# Altium PCB PCB8.pcbdoc
Units mm, origin at the board's own origin, x right, y up, seen from the top; angles counter-clockwise.
Board outline 57.74 x 56.26 mm, 2 copper layers (Top Layer, Bottom Layer); 43 components, 46 nets, 232 pads, 159 vias.
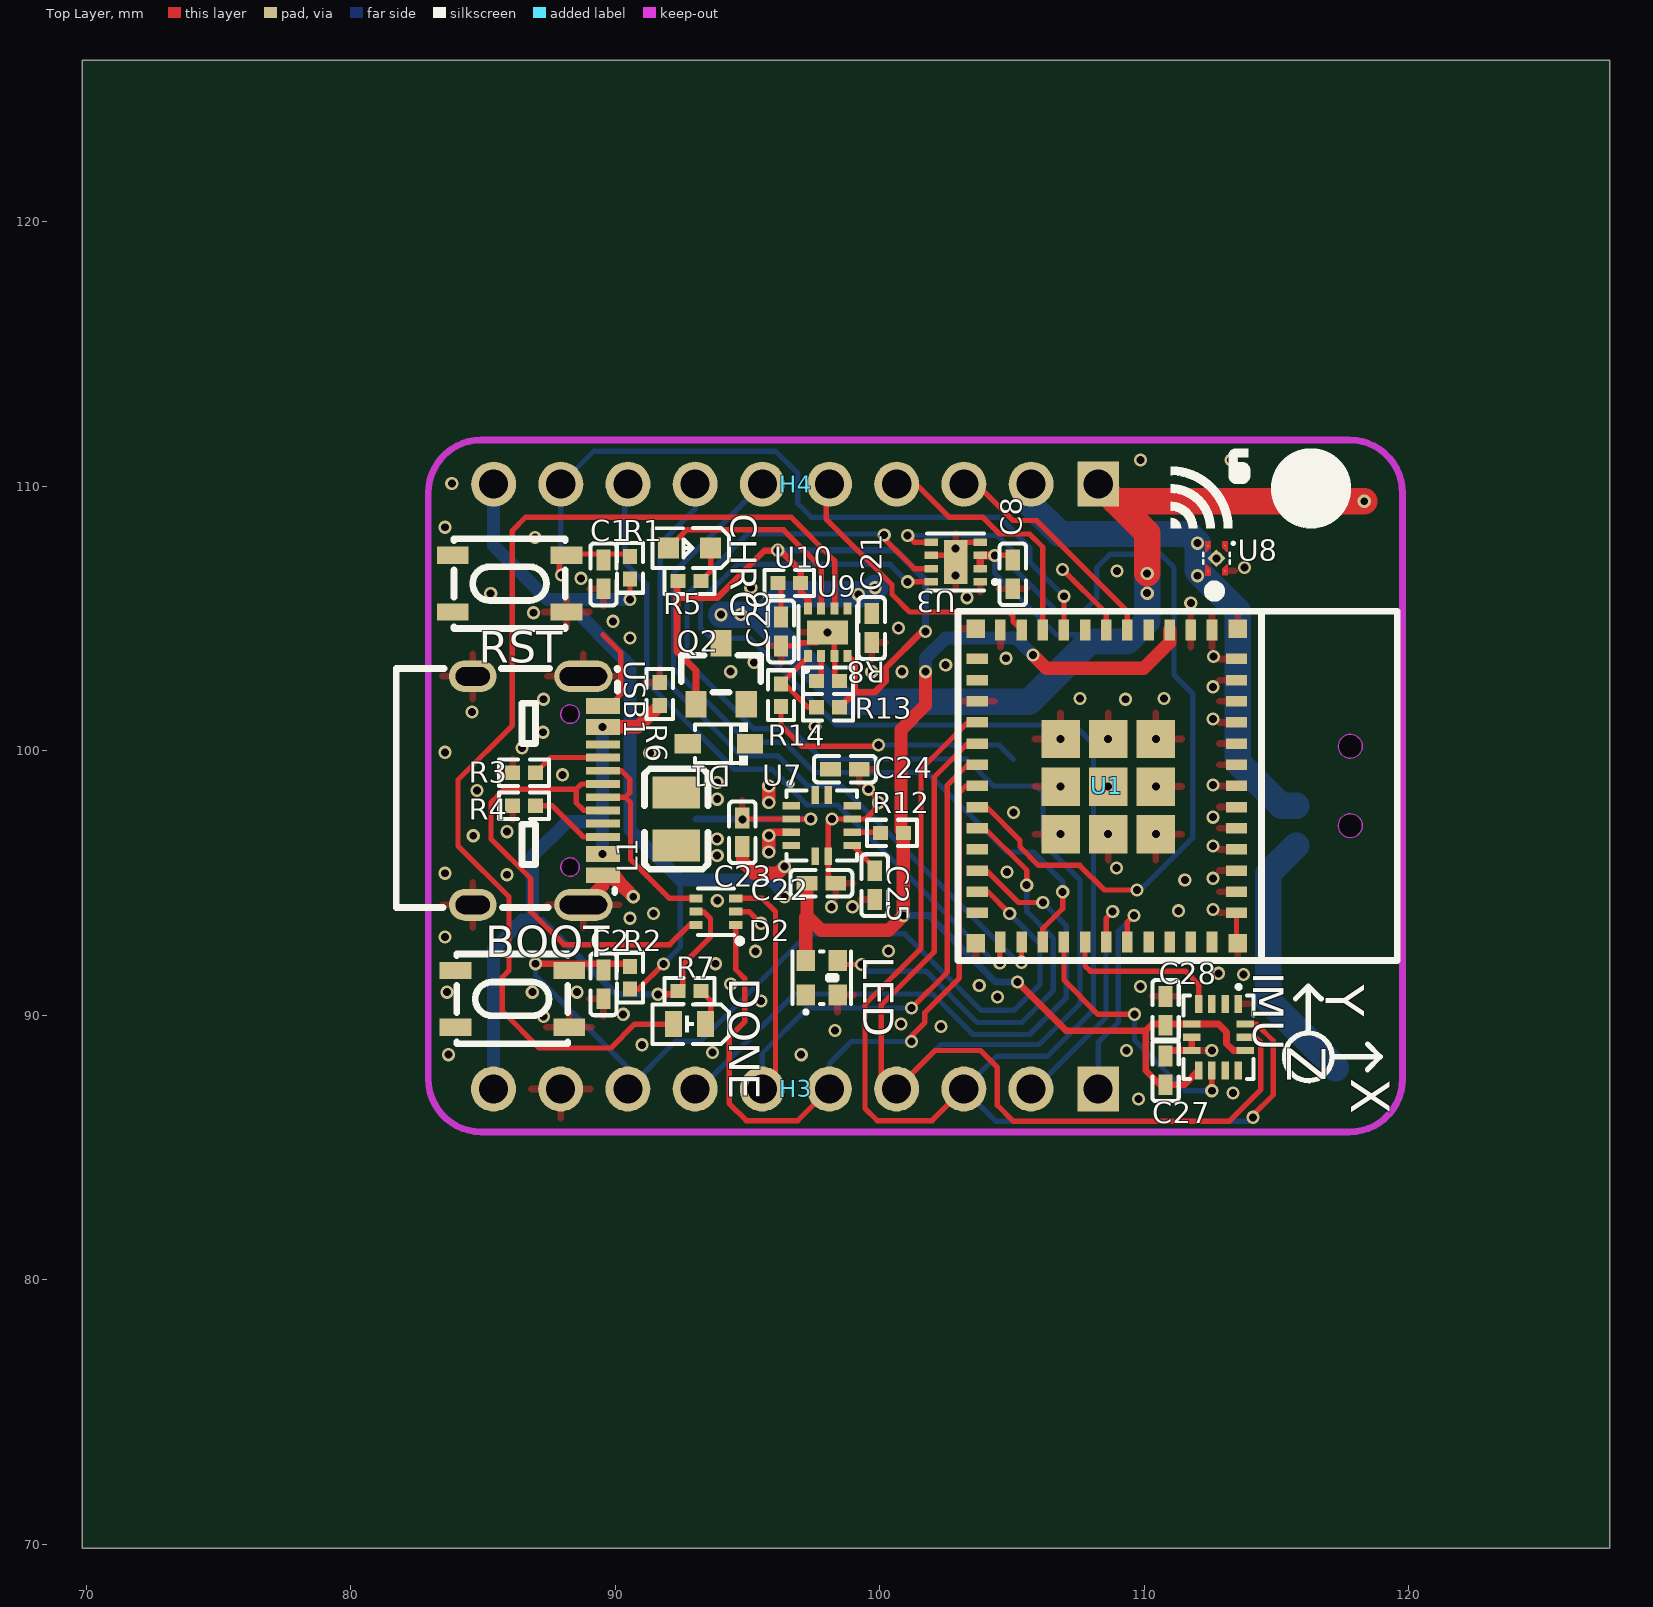
[diagram p0: Top Layer view]
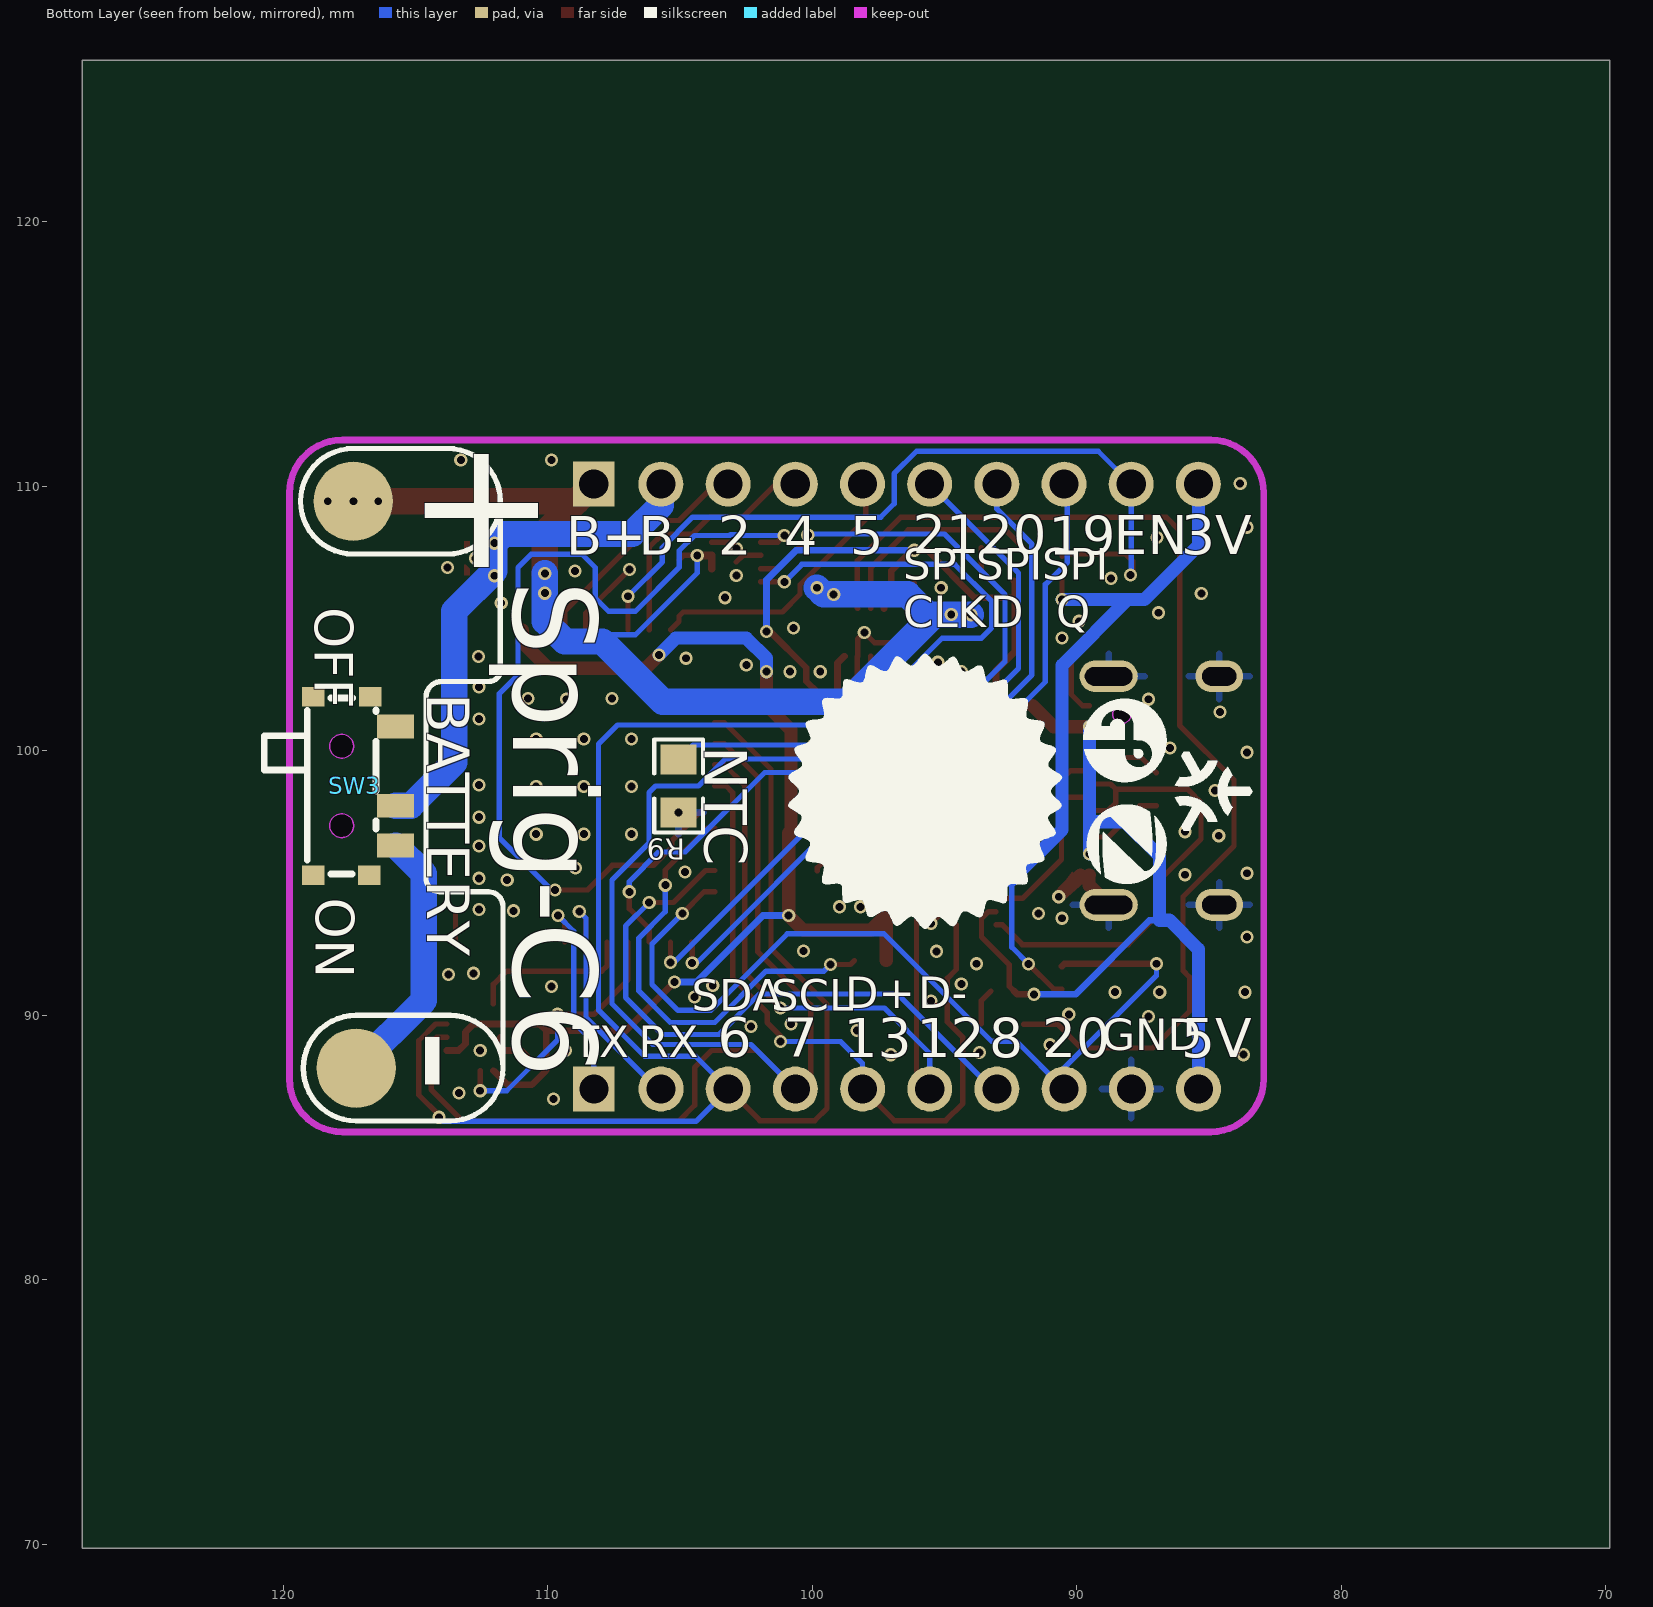
[diagram p1: Bottom Layer view, seen from below]

## Layer stack, top to bottom
Top Layer: signal copper (thickness not stored)
Dielectric: dielectric 0.32, FR-4, Dk 4.8
Bottom Layer: signal copper (thickness not stored)

## Board outline
127.594,69.85 69.85,69.85 69.85,126.111 127.594,126.111

## Design rules (kind name [scope] priority, off if disabled: settings)
BoardOutlineClearance copperThickness1oz [All] p0: genericclearance=0.254 ignorepadtopadclearanceinfootprint=FALSE except(0: Arc-SplitContinuation Track-SplitContinuation SMDPad-SplitContinuation THPad-SplitContinuation Via-SplitContinuation Fill-SplitContinuation Poly-SplitContinuation Region-SplitContinuation Text-SplitContinuation; 0.152: Track-CutoutEdge SMDPad-CutoutEdge THPad-CutoutEdge Via-CutoutEdge Region-CutoutEdge; 0.3: Track-OutlineEdge SMDPad-OutlineEdge THPad-OutlineEdge Via-OutlineEdge Fill-OutlineEdge Region-OutlineEdge Poly-OutlineEdge Text-OutlineEdge Fill-CutoutEdge)
BoardOutlineClearance copperThickness2oz [All] p0: genericclearance=0.254 ignorepadtopadclearanceinfootprint=FALSE except(0: Arc-SplitContinuation Track-SplitContinuation SMDPad-SplitContinuation THPad-SplitContinuation Via-SplitContinuation Fill-SplitContinuation Poly-SplitContinuation Region-SplitContinuation Text-SplitContinuation; 0.152: Track-CutoutEdge SMDPad-CutoutEdge THPad-CutoutEdge Via-CutoutEdge Region-CutoutEdge; 0.3: Track-OutlineEdge SMDPad-OutlineEdge THPad-OutlineEdge Via-OutlineEdge Fill-OutlineEdge Region-OutlineEdge Poly-OutlineEdge Text-OutlineEdge Fill-CutoutEdge)
Clearance copperThickness1oz [(InNet('D09') OR InNet('GND') OR InNet('EN') OR InNet('VBAT') OR InNet('VIN') OR InNet('VCC') OR InNet('DN1') OR InNet('DP1') OR InNet('RX') OR InNet('TX') OR InNet('D-') OR InNet('D+') OR InNet('SCL') OR InNet('SDA') OR InNet('D04') OR InNet('3.3V') OR InNet('D08') OR InNet('D05') OR InNet('B-') OR InNet('ALRT') OR InNet('$2N1935') OR InNet('$2N1945') OR InNet('$2N1952') OR InNet('$2N1959') OR InNet('$2N1954') OR InNet('$2N1955') OR InNet('D02') OR InNet('SPICLK') OR InNet('SPID') OR InNet('SPIQ') OR InNet('$2N1928') OR InNet('$2N1927') OR InNet('$2N1916') OR InNet('$2N1918') OR InNet('$2N1946') OR InNet('$2N1949') OR InNet('$2N1932') OR InNet('$2N1948') OR InNet('B-_C') OR InNet('RESET') OR InNet('BUSY') OR InNet('DIO1') OR InNet('D15') OR InNet('SPICS2') OR InNet('D22') OR InNet('D23'))] p1: gap=0.178 ignorepadtopadclearanceinfootprint=FALSE except(0.102: Track-Track; 0.152: Track-SMDPad SMDPad-SMDPad Track-THPad SMDPad-THPad THPad-THPad Track-Via SMDPad-Via THPad-Via Via-Via SMDPad-Fill THPad-Fill Via-Fill Fill-Fill Track-Region SMDPad-Region THPad-Region Via-Region Region-Region Track-Poly SMDPad-Poly THPad-Poly Via-Poly Fill-Poly Region-Poly Poly-Poly Track-Text SMDPad-Text THPad-Text Via-Text Fill-Text Region-Text Poly-Text Text-Text; 0.175: Track-Hole SMDPad-Hole THPad-Hole Via-Hole Fill-Hole Region-Hole Poly-Hole Text-Hole Sheet-Hole; 0.3: Track-Fill Fill-Region Track-Sheet SMDPad-Sheet THPad-Sheet Via-Sheet Fill-Sheet Region-Sheet Poly-Sheet Text-Sheet)
Clearance copperThickness2oz [All] p1: gap=0.178 ignorepadtopadclearanceinfootprint=FALSE except(0.152: Track-SMDPad SMDPad-SMDPad Track-THPad SMDPad-THPad THPad-THPad Track-Via SMDPad-Via THPad-Via Via-Via SMDPad-Fill THPad-Fill Via-Fill Fill-Fill Track-Region SMDPad-Region THPad-Region Via-Region Region-Region Track-Poly SMDPad-Poly THPad-Poly Via-Poly Fill-Poly Region-Poly Poly-Poly Track-Text SMDPad-Text THPad-Text Via-Text Fill-Text Region-Text Poly-Text Text-Text; 0.175: Track-Hole SMDPad-Hole THPad-Hole Via-Hole Fill-Hole Region-Hole Poly-Hole Text-Hole Sheet-Hole; 0.203: Track-Track; 0.3: Track-Fill Fill-Region Track-Sheet SMDPad-Sheet THPad-Sheet Via-Sheet Fill-Sheet Region-Sheet Poly-Sheet Text-Sheet)
DiffPairsRouting differentialPair [All] p1: maxuncoupledlength=10 minlimit=6 maxlimit=6 mostfreqgap=6 toplayer_minwidth=5 toplayer_prefwidth=10 toplayer_maxwidth=100 bottomlayer_minwidth=5 bottomlayer_prefwidth=10 bottomlayer_maxwidth=100
PasteMaskExpansion pasteMaskExpansion [All] p1: expansion=0
PlaneConnect innerPlane [All] p1: planeconnectstyle=Relief reliefexpansion=0.508 reliefentries=4 reliefconductorwidth=0.254 reliefairgap=0.254
PolygonConnect copperRegion [All] p1: connectstyle=Relief reliefentries=4 reliefconductorwidth=10 polygonreliefangle="90 Angle" airgapwidth=10
PolygonConnect solid [All] p1: connectstyle=Direct reliefentries=4 reliefconductorwidth=10 polygonreliefangle="90 Angle" airgapwidth=10
RoutingVias viaSize [All] p1: viastyle="Through Hole" holewidth=12.0078 minholewidth=11.811 maxholewidth=248.0314 width=24.0158 minwidth=19.685 maxwidth=393.7008
SolderMaskExpansion solderMaskExpansion [All] p1: useseparateexpansions=TRUE expansion=2 expansionbottom=2
Width copperThickness1oz [All] p1: maxlimit=100 minlimit=5 preferedwidth=10
Width copperThickness2oz [All] p1: maxlimit=100 minlimit=8 preferedwidth=10

## Components (designator, comment, footprint, x,y, rotation, side; value= is the part's Value field where it differs from the comment)
BOOT "TSA016A2518C" SW-SMD_4P-L4.2-W3.3-P2.15-LS4.6 86.104,90.627 r0 top
C1 "0402B104K160NT" C0402 89.554,106.677 r90 top
C2 "0402B104K160NT" C0402 89.554,91.177 r90 top
C8 "0402B104K160NT" C0402 105.029,106.68 r90 top
C21 "CL05A106MQ5NUNC" C0402 99.695,104.648 r90 top
C22 "HGC0402R5226M6R3NTEJ" C0402 97.79,94.996 r180 top
C23 "HGC0402R5226M6R3NTEJ" C0402 94.804,96.927 r270 top
C24 "HGC0402R5226M6R3NTEJ" C0402 98.679,99.314 r180 top
C25 "CC0402KRX7R9BB102" C0402 99.804,94.927 r90 top
C26 "CL05A106MQ5NUNC" C0402 96.266,104.521 r90 top
C27 "0402B104K160NT" C0402 110.804,87.927 r270 top
C28 "0402B104K160NT" C0402 110.804,90.177 r90 top
CHRG "NCD0603O3" LED0603-RD 92.804,107.677 r180 top
D1 "1N5819WS_C191023" SOD-323_L1.8-W1.3-LS2.5-RD 93.919,100.272 r180 top
D2 "USBLC6-2P6" SOT-666-6_L1.6-W1.2-P0.50-LS1.6-BL 93.804,93.927 r90 top
DONE "F.0603.00048/P2-0603W6YS2-06T-002" LED-SMD_L1.6-W0.8-RD-WHITE-2 92.804,89.677 r180 top
H3 "DZ254R-11-10-63" HDR-TH_10P-P2.54-V-M 96.825,87.221 r180 top
H4 "DZ254R-11-10-63" HDR-TH_10P-P2.54-V-M 96.829,110.089 r180 top
IMU "BMI260" LGA-14_L3.0-W2.5-P0.50-TL 112.804,89.177 r270 top
L1 "DFE201610E-1R5M=P2" L0806 92.304,97.427 r90 top
LED "SK6805D-EC2018" LED-SMD_4P-L2.0-W1.8-BL_SK6805D 97.804,91.427 r0 top
Q2 "AO3401A_C15127" SOT-23_L2.9-W1.3-P1.90-LS2.4-BR 93.998,102.919 r270 top
R1 "RMS04FT1002" R0402 90.554,106.927 r270 top
R2 "RMS04FT1002" R0402 90.554,91.427 r270 top
R3 "0402WGJ0512TCE" R0402 86.554,99.177 r180 top
R4 "0402WGJ0512TCE" R0402 86.554,97.927 r0 top
R5 "RC-02K681JT" R0402 92.804,106.427 r0 top
R6 "RMS04FT1002" R0402 91.677,102.153 r270 top
R7 "0402WGF2000TCE" R0402 92.804,90.927 r0 top
R8 "0402WGF2001TCE" R0402 98.042,102.649 r180 top
R9 "FNTC0805X104F4250FB" R0805 105.054,98.677 r90 bottom
R12 "0402WGF1004TCE" R0402 100.457,96.901 r0 top
R13 "0402WGF1003TCE" R0402 98.042,101.649 r180 top
R14 "ERJ2RKF6202X" R0402 96.266,102.108 r90 top
RST "TSA016A2518C" SW-SMD_4P-L4.2-W3.3-P2.15-LS4.6 86.004,106.327 r0 top
SW3 "MK-12C03-G015" SW-SMD_MK-12C03-G015 117.304,98.677 r270 bottom
U1 "ESP32-C6-MINI-1-N4" WIFIM-SMD_61P-L16.6-W13.2-P0.80-ESP32-C6-MINI-1-N4 108.585,98.679 r270 top
U3 "MAX17048G+T10" DFN-8_L2.0-W2.0-P0.50-BL-EP 102.87,107.145 r90 top
U7 "TPS63051RMWR" QFN-12_L2.5-W2.5-P0.50-TL 97.804,97.177 r0 top
U8 "AP6683" DFN-4_L1.0-W1.0-P0.65-BL-EP 112.73,107.285 r180 top
U9 "LGS4056H" DFN-8_L2.0-W2.0-P0.50-TL-EP1.6 98.031,104.485 r90 top
U10 "FRC0402F1R00TS" R0402 96.576,106.352 r180 top
USB1 "U262-161N-4BVC11" USB-3.1-SMD_U262-161N-4BVC11 87.071,98.501 r270 top

## Footprints (in the part's own frame and the unit in brackets; to place one, negate y for a bottom-side part, rotate by r counter-clockwise, add the part's x,y. Pads: shape width x height; smd on the part's side, far side on the other; paste and mask are expansions set on the pad)
C0402 [mm]
  rect 0.79x0.54 smd: 1(-0.545,0) 2(0.545,0)
  silkscreen extent -1.17,-0.5 1.17,0.5
DFN-4_L1.0-W1.0-P0.65-BL-EP [mm]
  round 0.04 smd: 1(-0.325,-0.475) 2(0.325,-0.474) 3(0.325,0.475) 4(-0.325,0.475)
  rect 0.48x0.48 smd rot 45: 5(0.004,0.001)
  Top Layer region: 0.425,-0.649 0.225,-0.649 0.225,-0.399 0.225,-0.399 0.375,-0.249 0.425,-0.249
  Top Layer region: -0.225,-0.4 -0.225,-0.65 -0.425,-0.65 -0.425,-0.25 -0.375,-0.25
  Top Layer region: -0.425,0.651 -0.225,0.651 -0.225,0.401 -0.225,0.401 -0.375,0.251 -0.425,0.251
  Top Layer region: 0.425,0.651 0.225,0.651 0.225,0.401 0.225,0.401 0.375,0.251 0.425,0.251
  silkscreen extent -0.68,-0.61 0.5,0.21
DFN-8_L2.0-W2.0-P0.50-BL-EP [mm]
  rect 0.28x0.505 smd: 1(-0.75,-0.927) 2(-0.25,-0.927) 3(0.25,-0.927) 4(0.75,-0.927) 5(0.75,0.928) 6(0.25,0.928) 7(-0.25,0.928) 8(-0.75,0.928)
  rect 1.65x0.9 smd: 9(0,0)
  silkscreen extent -1.08,-1.56 1.08,1.08
DFN-8_L2.0-W2.0-P0.50-TL-EP1.6 [mm]
  rect 0.45x0.3 smd: 1(-0.9,0.75) 2(-0.9,0.25) 3(-0.9,-0.25) 4(-0.9,-0.75) 5(0.9,-0.75) 6(0.9,-0.25) 7(0.9,0.25) 8(0.9,0.75)
  rect 0.9x1.55 smd: 9(-0.001,0.002)
  silkscreen extent -1.49,-1.1 1,1.1
HDR-TH_10P-P2.54-V-M [mm]
  rect 1.575x1.7 hole 1.1: 1(-11.43,0)
  round 1.7 hole 1.1: 2(-8.89,0) 3(-6.35,0) 4(-3.81,0) 5(-1.27,0) 6(1.27,0) 7(3.81,0) 8(6.35,0) 9(8.89,0) 10(11.43,0)
L0806 [mm]
  rect 1.2x1.8 smd: 1(-1,0) 2(1,0)
  silkscreen extent -1.9,-1.2 1.9,1.2
LED0603-RD [mm]
  rect 0.8x0.8 smd: 1(-0.799,-0.003) 2(0.799,0.003)
  silkscreen extent -1.49,-0.75 1.39,0.76
LED-SMD_4P-L2.0-W1.8-BL_SK6805D [mm]
  rect 0.7x0.8 smd: 1(-0.6,-0.65) 2(0.6,-0.65) 3(0.6,0.65) 4(-0.6,0.65)
  silkscreen extent -1.1,-1.36 1.1,1
LED-SMD_L1.6-W0.8-RD-WHITE-2 [mm]
  rect 0.65x1 smd: 1(-0.6,0) 2(0.6,0)
  silkscreen extent -1.49,-0.75 1.39,0.76
LGA-14_L3.0-W2.5-P0.50-TL [mm]
  rect 0.675x0.28 smd: 1(-1.262,0.75) 2(-1.262,0.25) 3(-1.262,-0.25) 4(-1.262,-0.75) 8(1.262,-0.75) 9(1.262,-0.25) 10(1.262,0.25) 11(1.262,0.75)
  rect 0.28x0.675 smd: 5(-0.5,-1.012) 6(0,-1.012) 7(0.5,-1.012) 12(0.5,1.012) 13(0,1.012) 14(-0.5,1.012)
  silkscreen extent -1.98,-1.33 1.58,1.33
QFN-12_L2.5-W2.5-P0.50-TL [mm]
  rect 0.665x0.28 smd: 1(-1.157,0.75) 2(-1.157,0.25) 3(-1.157,-0.25) 4(-1.157,-0.75) 7(1.157,-0.75) 8(1.157,-0.25) 9(1.157,0.25) 10(1.157,0.75)
  rect 0.28x0.665 smd: 5(-0.25,-1.157) 6(0.25,-1.157) 11(0.25,1.157) 12(-0.25,1.157)
  silkscreen extent -1.33,-1.33 1.33,1.66
R0402 [mm]
  rect 0.566x0.54 smd: 1(-0.433,0) 2(0.433,0)
  silkscreen extent -0.94,-0.5 0.94,0.5
R0805 [mm]
  rect 1.133x1.377 smd: 1(-1,0) 2(1,0)
  silkscreen extent -1.76,-0.92 1.76,0.92
SOD-323_L1.8-W1.3-LS2.5-RD [mm]
  rect 1x0.75 smd: 1(-1.173,0) 2(1.173,0)
  silkscreen extent -1.08,-0.8 0.9,0.8
SOT-23_L2.9-W1.3-P1.90-LS2.4-BR [mm]
  rect 1x0.8 smd: 1(1.15,-0.95) 2(1.15,0.95) 3(-1.15,0)
  silkscreen extent -0.7,-1.5 0.7,1.5
SOT-666-6_L1.6-W1.2-P0.50-LS1.6-BL [mm]
  rect 0.3x0.5 smd: 1(-0.5,-0.75) 2(0,-0.75) 3(0.5,-0.75) 4(0.5,0.75) 5(0,0.75) 6(-0.5,0.75)
  silkscreen extent -1.21,-1.01 0.88,0.68
SW-SMD_4P-L4.2-W3.3-P2.15-LS4.6 [mm]
  rect 1.2x0.65 smd: 1(-2.15,1.075) 2(2.15,1.075) 3(-2.15,-1.075) 4(2.15,-1.075)
  silkscreen extent -2.1,-1.7 2.1,1.7
SW-SMD_MK-12C03-G015 [mm]
  rect 0.9x1.4 smd: 1(-2.25,1.559) 2(0.75,1.559) 3(2.25,1.559)
  rect 0.75x0.85 smd: 4(-3.375,0.592) 5(-3.375,-1.559) 6(3.375,0.567) 7(3.375,-1.558)
  Board Outline Layer circle w0.005: c1.5,-0.483 r0.45
  Board Outline Layer circle w0.005: c-1.5,-0.484 r0.45
  Board Outline Layer region: 1.5,-0.933 1.695,-0.889 1.852,-0.764 1.938,-0.583 1.938,-0.383 1.852,-0.203 1.695,-0.078 1.5,-0.033 1.5,-0.033 1.304,-0.078 1.148,-0.203 1.061,-0.383 1.061,-0.583 1.148,-0.764 1.304,-0.889 1.5,-0.933
  Board Outline Layer region: -1.5,-0.934 -1.305,-0.889 -1.148,-0.764 -1.062,-0.584 -1.062,-0.383 -1.148,-0.203 -1.305,-0.078 -1.5,-0.034 -1.5,-0.034 -1.696,-0.078 -1.852,-0.203 -1.939,-0.383 -1.939,-0.584 -1.852,-0.764 -1.696,-0.889 -1.5,-0.934
  Multi-Layer board cut-out: 1.5,-0.933 1.695,-0.889 1.852,-0.764 1.938,-0.583 1.938,-0.383 1.852,-0.203 1.695,-0.078 1.5,-0.033 1.5,-0.033 1.304,-0.078 1.148,-0.203 1.061,-0.383 1.061,-0.583 1.148,-0.764 1.304,-0.889 1.5,-0.933
  Multi-Layer board cut-out: -1.5,-0.934 -1.305,-0.889 -1.148,-0.764 -1.062,-0.584 -1.062,-0.383 -1.148,-0.203 -1.305,-0.078 -1.5,-0.034 -1.5,-0.034 -1.696,-0.078 -1.852,-0.203 -1.939,-0.383 -1.939,-0.584 -1.852,-0.764 -1.696,-0.889 -1.5,-0.934
  silkscreen extent -3.33,-3.41 3.32,0.82
USB-3.1-SMD_U262-161N-4BVC11 [mm]
  rect 0.6x1.3 smd: A1B12(-3.2,2.461) A4B9(-2.4,2.461) B1A12(3.2,2.461) B4A9(2.4,2.461)
  rect 0.3x1.3 smd: A5(-1.25,2.461) A6(-0.25,2.461) A7(0.25,2.461) A8(1.25,2.461) B5(1.75,2.461) B6(0.75,2.461) B7(-0.75,2.461) B8(-1.75,2.461)
  oval 1.2x2.2 hole 0.7 slot 1.8 at 90 deg: SHELL(-4.32,1.719) SHELL(4.32,1.719)
  oval 1.2x1.8 hole 0.7 slot 1.3 at 90 deg: SHELL(-4.32,-2.461) SHELL(4.32,-2.461)
  Board Outline Layer circle w0.005: c2.89,1.219 r0.35
  Board Outline Layer circle w0.005: c-2.89,1.219 r0.35
  Board Outline Layer region: 2.89,1.569 3.042,1.534 3.164,1.437 3.231,1.297 3.231,1.141 3.164,1 3.042,0.903 2.89,0.869 2.89,0.869 2.738,0.903 2.616,1 2.549,1.141 2.549,1.297 2.616,1.437 2.738,1.534 2.89,1.569
  Board Outline Layer region: -2.89,1.569 -2.738,1.534 -2.616,1.437 -2.549,1.297 -2.549,1.141 -2.616,1 -2.738,0.903 -2.89,0.869 -2.89,0.869 -3.042,0.903 -3.164,1 -3.231,1.141 -3.231,1.297 -3.164,1.437 -3.042,1.534 -2.89,1.569
  Multi-Layer board cut-out: 2.89,1.569 3.042,1.534 3.164,1.437 3.231,1.297 3.231,1.141 3.164,1 3.042,0.903 2.89,0.869 2.89,0.869 2.738,0.903 2.616,1 2.549,1.141 2.549,1.297 2.616,1.437 2.738,1.534 2.89,1.569
  Multi-Layer board cut-out: -2.89,1.569 -2.738,1.534 -2.616,1.437 -2.549,1.297 -2.549,1.141 -2.616,1 -2.738,0.903 -2.89,0.869 -2.89,0.869 -3.042,0.903 -3.164,1 -3.231,1.141 -3.231,1.297 -3.164,1.437 -3.042,1.534 -2.89,1.569
  silkscreen extent -4.62,-5.35 4.42,3.01
WIFIM-SMD_61P-L16.6-W13.2-P0.80-ESP32-C6-MINI-1-N4 [mm]
  rect 0.8x0.4 smd: 1(-5.9,3.975) 2(-5.9,3.175) 3(-5.9,2.375) 4(-5.9,1.575) 5(-5.9,0.775) 6(-5.9,-0.025) 7(-5.9,-0.825) 8(-5.9,-1.625) 9(-5.9,-2.425) 10(-5.9,-3.225) 11(-5.9,-4.025) 25(5.9,-4.025) 26(5.9,-3.225) 27(5.9,-2.425) 28(5.9,-1.625) 29(5.9,-0.825) 30(5.9,-0.025) 31(5.9,0.775) 32(5.9,1.575) 33(5.9,2.375) 34(5.9,3.175) 35(5.9,3.975)
  rect 0.4x0.8 smd: 12(-4.8,-4.9) 13(-4,-4.9) 14(-3.2,-4.9) 15(-2.4,-4.9) 16(-1.6,-4.9) 17(-0.8,-4.9) 18(0,-4.9) 19(0.8,-4.9) 20(1.6,-4.9) 21(2.4,-4.9) 22(3.2,-4.9) 23(4,-4.9) 24(4.8,-4.9) 36(4.8,4.9) 37(4,4.9) 38(3.2,4.9) 39(2.4,4.9) 40(1.6,4.9) 41(0.8,4.9) 42(0,4.9) 43(-0.8,4.9) 44(-1.6,4.9) 45(-2.4,4.9) 46(-3.2,4.9) 47(-4,4.9) 48(-4.8,4.9)
  rect 1.45x1.45 smd: 49(-1.775,1.85) 49(-1.775,0.05) 49(-1.775,-1.75) 49(0.025,1.85) 49(0.025,0.05) 49(0.025,-1.75) 49(1.825,1.85) 49(1.825,0.05) 49(1.825,-1.75)
  rect 0.7x0.7 smd: 50(5.95,4.95) 51(5.95,-4.95) 52(-5.95,-4.95) 53(-5.95,4.95)
  silkscreen extent -7.57,-5.62 6.6,10.98

## Free pads (board coordinates)
  round 3 smd far side: 1(117.348,109.441) 2(117.244,88.01)

## Via types
v1: diameter 0.5, hole 0.3, Top Layer to Bottom Layer, 159 vias

## Nets (pads, with @x,y where several pads share a name; then routed paths per layer and width w, separated by ;. In a path a pad name is that pad's centre, name@x,y a point inside that pad or via, vN(x,y) a via of type N, cw(c..) or ccw(c..) an arc to the next point about the centre after c; other vN are vias at no path point)
3.3V: C22.2 C23.2 C27.2 C28.1 H4.10 IMU.5 IMU.8 IMU.12 LED.4 R1.2 R2.2 R12.2 U1.3 U7.4 U7.5 | length 81.6
  Top Layer w0.2: R2.2 90.867,90.994 v1(91.821,91.948) ; v1(90.554,105.732) R1.2
  Top Layer w0.254: v1(105.207,91.262) 107.042,89.427 110.054,89.427 ; IMU.8 111.521,87.382 C27.2 110.599,87.382 110.054,87.927 110.054,89.427 ; IMU.12 113.365,88.677 113.111,88.931 113.111,89.37 112.804,89.677 IMU.5 110.849,89.677 C28.1 110.759,89.677 110.304,89.677 110.054,89.427
  Top Layer w0.5: C23.2 94.804,95.823 95.25,95.377 96.139,95.377 v1(96.393,95.631) ; LED.4 97.204,93.722 97.245,93.763 ; C22.2 97.245,93.763 ; v1(101.727,102.997) 101.727,101.727 100.804,100.804 100.804,96.987 R12.2 v1(100.89,93.778) 100.33,93.218 97.79,93.218 97.245,93.763 ; v1(105.791,103.632) 106.299,103.124 109.982,103.124 110.96,104.102 U1.3
  Bottom Layer w0.2: v1(91.821,91.948) 92.456,92.583 92.456,95.123
  Bottom Layer w0.254: v1(100.89,93.778) 101.865,93.778 104.38,91.262 v1(105.207,91.262)
  Bottom Layer w0.5: H4.10 85.399,107.768 87.435,105.732 88.07,105.732 ; v1(90.554,105.732) 88.07,105.732 ; v1(96.393,94.484) 96.393,94.615 95.885,95.123 ; v1(96.393,95.631) 95.885,95.123 ; v1(101.727,102.997) 101.727,103.505 102.489,104.267 105.156,104.267 v1(105.791,103.632) ; 88.07,105.732 90.554,103.248 90.554,97.025 92.456,95.123 95.885,95.123
$2N1916: R3.1 USB1.A5 | length 2.8
  Top Layer w0.2: R3.1 87.561,99.751 USB1.A5
$2N1918: R4.2 USB1.B5 | length 3
  Top Layer w0.2: R4.2 87.62,97.927 88.796,96.751 USB1.B5
$2N1927: L1.1 U7.3 | length 1.5
  Top Layer w0.28: v1@95.804,96.872 95.859,96.927 U7.3
  Top Layer w0.5: v1(95.804,96.177) v1(95.804,96.8)
  other v1: 93.851,96.05 93.851,96.677
$2N1928: L1.2 U7.1 | length 0.6
  Top Layer w0.5: v1(95.804,98.054) v1(95.804,98.677)
  other v1: 93.853,98.179 93.853,98.806
$2N1932: R12.1 U7.8 | length 1.1
  Top Layer w0.2: U7.8 99.998,96.927 R12.1
$2N1935: C25.2 U7.7 | length 1.3
  Top Layer w0.2: U7.7 99.804,95.584 C25.2
$2N1945: C26.2 U10.2 | length 1.3
  Top Layer w0.2: U10.2 96.266,106.23 C26.2
$2N1946: R8.2 U9.2 | length 1
  Top Layer w0.2: R8.2 97.781,102.821 U9.2
$2N1948: R13.2 R14.2 U9.1 | length 3.2
  Top Layer w0.2: U9.1 97.281,103.556 R14.2 96.39,102.541 97.282,101.649 R13.2
$2N1949: R9.2 R14.1 | length 10.1
  Top Layer w0.2: R14.1 96.266,100.965 97.056,100.175 99.904,100.175 v1(99.953,100.224)
  Bottom Layer w0.2: v1(99.953,100.224) 104.507,100.224 R9.2
$2N1952: CHRG.2 U9.7 | length 8.2
  Top Layer w0.2: CHRG.2 92.69,108.359 96.365,108.359 97.781,106.943 U9.7
$2N1954: DONE.1 R7.2 | length 1.4
  Top Layer w0.2: R7.2 93.603,90.56 DONE.1@93.603,89.68
$2N1955: DONE.2 U9.6 | length 42
  Top Layer w0.2: DONE.2@92.005,89.674 90.731,89.674 89.83,88.773 87.122,88.773 85.725,90.17 85.725,91.44 85.979,91.694 85.979,94.488 84.054,96.413 84.054,98.913 86.106,100.965 86.106,108.331 86.614,108.839 96.647,108.839 98.298,107.188 98.298,105.402 U9.6
$2N1959: CHRG.1 R5.2 | length 1.4
  Top Layer w0.2: R5.2 93.603,106.794 CHRG.1
ALRT: U1.19 U3.5 | length 35.3
  Top Layer w0.2: v1(101.053,108.149) 101.307,107.895 U3.5 ; U1.19 104.044,97.879 105.304,96.619 105.304,96.377 106.004,95.677 107.554,95.677 108.489,94.742 v1(109.728,94.742)
  Bottom Layer w0.2: v1(101.053,108.149) 102.618,108.149 102.651,108.182 103.089,108.182 103.122,108.149 104.449,108.149 105.029,107.569 105.029,106.934 106.68,105.283 107.696,105.283 108.204,105.791 108.204,106.934 108.712,107.442 110.617,107.442 111.125,106.934 111.125,102.87 111.836,102.159 111.836,96.723 109.855,94.742 v1(109.728,94.742)
B-: H4.2 SW3.2 U8.2 U8.3 U8.5 | length 19.5
  Bottom Layer w1: H4.2 105.719,109.292 106.807,108.204 111.667,108.204 v1(112.014,107.857) 112.014,106.807 113.538,105.283 113.538,99.568 115.179,97.927 SW3.2
  other v1: 112.014,106.624 112.726,107.284
B-_C: pad.2 SW3.3 | length 9.9
  Bottom Layer w1: SW3.3 114.681,95.363 114.681,90.573 pad.2
BUSY: U1.12
D02: H4.3 U1.5 | length 8.9
  Top Layer w0.2: H4.3 103.652,110.089 105.029,108.712 105.918,108.712 109.36,105.27 U1.5
D04: H4.4 U1.9 | length 9.6
  Top Layer w0.2: H4.4 101.366,110.089 102.616,108.839 103.886,108.839 104.521,108.204 105.664,108.204 106.16,107.708 U1.9
D05: H4.5 U1.10 | length 10.8
  Top Layer w0.2: H4.5 97.972,109.962 97.972,108.77 100.457,106.285 100.457,105.926 101.125,105.258 104.875,105.258 105.039,105.095 105.039,104.892 105.352,104.579 U1.10
D08: H3.7 U1.22 | length 23.7
  Top Layer w0.2: U1.22 104.032,95.479 105.242,94.269 v1(106.162,94.269)
  Bottom Layer w0.2: H3.7 93.19,87.221 96.78,90.811 102.001,90.811 103.53,89.281 105.658,89.281 107.054,90.677 107.054,93.377 v1(106.162,94.269)
D09: BOOT.2 C2.2 H3.8 R2.1 U1.23 | length 34.1
  Top Layer w0.2: U1.23 104.084,94.679 v1(104.91,93.853)
  Top Layer w0.254: v1(86.986,91.956) 90.458,91.956 R2.1
  Bottom Layer w0.2: v1(86.986,91.956) 86.986,91.507 90.475,88.018 H3.8 92.281,89.027 93.218,89.027 97.282,93.091 100.94,93.091 103.835,90.195 105.072,90.195 106.054,91.177 106.054,92.709 v1(104.91,93.853)
D15: LED.3 U1.20 | length 17.1
  Top Layer w0.2: LED.3 98.554,91.927 v1(99.304,91.927) ; U1.20 103.968,97.079 105.554,95.493 v1(105.554,94.927)
  Bottom Layer w0.2: v1(99.304,91.927) 99.554,91.677 101.744,91.677 103.683,89.738 105.365,89.738 106.554,90.927 106.554,92.927 105.554,93.927 v1(105.554,94.927)
D22: IMU.9 U1.28 | length 10.1
  Top Layer w0.2: U1.28 106.96,91.338 108.255,90.043 v1(109.626,90.043) ; v1(112.554,87.153) IMU.9
  Bottom Layer w0.2: v1(109.626,90.043) 109.626,89.077 111.55,87.153 v1(112.554,87.153)
D23: IMU.4 U1.29 | length 6.2
  Top Layer w0.2: U1.29 107.76,91.877 107.96,91.677 111.554,91.677 112.054,91.177 IMU.4
D+: D2.1 H3.5 U1.18 | length 27
  Top Layer w0.2: D2.1 94.554,91.741 94.89,91.405 94.89,89.759 94.304,89.173 94.304,86.677 94.956,86.025 96.899,86.025 H3.5 ; v1(101.194,89.017) 101.194,89.231 101.702,89.738 101.702,90.11 103.006,91.415 103.006,98.434 103.251,98.679 U1.18
  Bottom Layer w0.2: H3.5 98.095,88.189 98.923,89.017 v1(101.194,89.017)
D-: D2.3 H3.6 U1.17 | length 26.8
  Top Layer w0.2: D2.3 95.554,94.427 96.054,93.927 96.054,87.72 H3.6 ; v1(101.2,90.282) 102.554,91.636 102.554,98.707 103.326,99.479 U1.17
  Bottom Layer w0.2: H3.6 95.555,88.57 97.267,90.282 v1(101.2,90.282)
DIO1: U1.13
DN1: D2.4 USB1.A7 USB1.B7 | length 8.3
  Top Layer w0.2: USB1.A7 90.377,98.251 ; USB1.B7 90.233,99.251 90.551,98.933 90.551,98.425 90.377,98.251 ; D2.4 92.054,94.427 90.577,95.904 90.577,98.051 90.377,98.251
DP1: D2.6 USB1.A6 USB1.B6 | length 18
  Top Layer w0.2: USB1.B6 88.812,97.751 88.519,98.044 88.519,98.552 ; USB1.A6 88.718,98.751 88.519,98.552 ; D2.6 92.804,93.427 92.054,92.677 88.054,92.677 86.804,93.927 86.804,95.177 85.304,96.677 85.304,98.052 85.559,98.307 85.559,98.313 85.723,98.476 85.728,98.476 85.804,98.552 88.519,98.552
EN: C1.2 H4.9 R1.1 RST.2 U1.8 | length 30.9
  Top Layer w0.2: v1(87.969,106.655) 87.884,106.74 87.884,107.18 88.154,107.45 90.464,107.45 R1.1 ; U1.8 v1(106.96,105.849)
  Bottom Layer w0.2: v1(87.969,106.655) 87.939,106.685 H4.9 89.183,111.333 96.058,111.333 96.901,110.49 96.901,109.347 97.409,108.839 104.521,108.839 105.664,107.696 105.664,107.145 v1(106.96,105.849)
GND: BOOT.4 C1.1 C2.1 C8.1 C21.1 C22.1 C23.1 C24.1 C25.1 C26.1 C27.1 C28.2 D2.2 H3.9 IMU.1 IMU.6 IMU.7 LED.2 R3.2 R4.1 R6.1 R8.1 R9.1 RST.4 U1.1 U1.2 U1.11 U1.14 U1.36 U1.37 U1.38 U1.39 U1.40 U1.41 U1.42 U1.43 U1.44 U1.45 U1.46 U1.47 U1.48 U1.49 U1.50 U1.51 U1.52 U1.53 U3.1 U3.4 U3.6 U3.9 U7.2 U7.6 U7.9 U8.4 U9.3 U9.9 USB1.A1B12 USB1.B1A12 USB1.SHELL | length 28.1
  Top Layer w0.2: USB1.A1B12@89.515,101.712 89.774,101.712 90.204,102.142 90.204,103.725 89.535,104.394 ; D2.2 95.061,93.927 v1(95.504,93.484) ; C23.1 94.849,97.427 U7.2 v1(97.389,97.427) ; C26.1 96.902,103.976 97.016,104.089 97.634,104.089 v1(98.029,104.484) 98.281,104.232 U9.3 98.292,103.574 98.292,102.832 R8.1 ; C22.1 98.054,95.277 U7.6 98.054,97.291 v1(98.19,97.427) U7.9 99.459,97.427 99.822,97.79 99.822,98.298 v1(99.568,98.552) ; U3.6 102.62,107.395 U3.9 ; v1(102.87,107.653) 103.112,107.895 U3.4 ; U1.36 113.485,92.779 U1.50
  Top Layer w0.254: C27.1 111.009,88.677 IMU.7 IMU.6
  Top Layer w0.5: USB1.SHELL@88.79,94.181 89.532,94.924 USB1.B1A12 ; USB1.B1A12@89.515,95.312 USB1.B1A12@89.532,95.312 ; USB1.B1A12@89.854,95.312 v1(90.678,94.488)
  Bottom Layer w0.254: 93.054,97.427 v1(97.389,97.427)
  other v1: 109.779,86.843 113.356,87.067 83.693,88.519 97.028,88.519 93.672,88.601 109.322,88.671 112.554,88.677 91.012,88.891 98.304,89.427 102.311,89.586 100.804,89.677 87.289,89.956 90.297,90.043 95.504,90.551 104.445,90.697 83.64,90.881 86.863,90.881 88.552,90.881 109.859,91.091 103.759,91.135 94.361,91.186 113.746,91.55 112.804,91.595 93.789,91.956 95.304,92.427 100.33,92.439 83.566,92.964 90.554,93.677 91.44,93.853 111.289,93.956 112.596,94.006 98.171,94.107 98.966,94.108 93.858,94.341 111.532,95.123 112.596,95.187 85.902,95.32 83.566,95.377 104.804,95.427 108.948,95.579 112.596,96.406 84.628,96.795 106.835,96.854 108.635,96.854 110.435,96.854 85.902,96.949 94.804,97.407 112.596,97.498 105.054,97.677 99.953,98.044 84.766,98.501 106.835,98.654 108.635,98.654 110.435,98.654 112.596,98.717 88.004,99.1 91.304,99.927 83.566,99.949 86.474,100.11 106.835,100.454 108.635,100.454 110.435,100.454 87.269,100.707 97.554,100.927 112.596,101.206 84.582,101.473 87.289,101.956 109.289,101.956 107.569,101.981 110.744,101.981 112.596,102.425 94.361,102.997 99.695,102.997 100.838,102.997 102.489,103.251 95.251,103.352 104.775,103.505 112.611,103.568 90.551,104.267 100.711,104.648 89.916,104.902 86.908,105.226 111.76,105.595 103.292,105.797 85.289,105.956 95.123,106.172 88.707,106.527 102.87,106.637 108.966,106.807 113.792,106.934 86.968,108.075 83.566,108.458 83.82,110.109 109.855,110.998 113.284,110.998
RESET: U1.6 | length 3
  Top Layer w0.2: v1(106.909,106.865) 108.56,105.214 U1.6
RX: H3.2 U1.30 | length 9.3
  Top Layer w0.2: U1.30 108.56,93.683 v1(108.804,93.927)
  Bottom Layer w0.2: H3.2 105.848,87.221 108.554,89.927 108.554,93.677 v1(108.804,93.927)
SCL: H3.4 IMU.13 U1.16 U3.7 | length 80
  Top Layer w0.2: v1(100.164,108.165) 100.164,108.032 101.301,106.895 U3.7@101.942,106.895 ; U1.16 103.326,100.279 102.054,99.007 102.054,92.402 100.054,90.402 100.054,87.802 H3.4 102.091,88.677 103.804,88.677 104.445,88.036 104.445,86.607 105.054,85.998 113.201,85.998 114.406,87.203 114.406,88.977 114.206,89.177 IMU.13
  Bottom Layer w0.2: v1(100.164,108.165) 100.125,108.204 94.996,108.204 92.71,105.918 92.71,103.378 95.25,100.838 96.647,100.838 97.79,99.695 103.286,99.695 104.302,98.679 105.918,98.679 106.172,98.425 106.172,96.52 107.569,95.123 107.569,90.442 106.027,88.9 102.314,88.9 H3.4
SDA: H3.3 IMU.14 U1.15 U3.8 | length 80.5
  Top Layer w0.2: v1(101.053,106.395) U3.8 ; H3.3 101.979,86.025 99.903,86.025 99.441,86.487 99.441,90.424 101.554,92.537 101.554,99.307 103.326,101.079 U1.15 ; IMU.14 114.242,89.677 114.876,89.043 114.876,86.999 114.109,86.232 v1(114.109,86.148)
  Bottom Layer w0.2: v1(101.053,106.395) 100.391,107.057 94.611,107.057 93.218,105.664 93.218,104.648 93.599,104.267 95.084,104.267 98.368,100.983 107.358,100.983 108.077,100.264 108.077,90.2 106.337,88.46 104.414,88.46 H3.3 104.398,85.998 113.959,85.998 v1(114.109,86.148)
SPICLK: H4.6 U1.27 | length 29
  Top Layer w0.2: U1.27 106.16,93.283 106.914,94.037 v1(106.914,94.675)
  Bottom Layer w0.2: H4.6 92.202,106.732 92.202,103.124 94.996,100.33 96.393,100.33 97.536,99.187 101.794,99.187 104.804,96.177 105.804,96.177 106.914,95.067 v1(106.914,94.675)
SPICS2: U1.24
SPID: H4.7 U1.26 | length 26.7
  Top Layer w0.2: v1(105.36,92.009) U1.26
  Bottom Layer w0.2: H4.7 93.019,109.148 91.694,107.823 91.694,102.87 94.742,99.822 96.139,99.822 97.282,98.679 98.552,98.679 105.222,92.009 v1(105.36,92.009)
SPIQ: H4.8 U1.25 | length 26.4
  Top Layer w0.2: v1(104.536,91.985) 104.536,92.755 U1.25
  Bottom Layer w0.2: H4.8 90.352,109.962 90.352,107.133 91.186,106.299 91.186,102.616 94.488,99.314 95.915,99.314 96.333,98.896 96.333,98.866 97.243,97.956 98.396,97.956 104.367,91.985 v1(104.536,91.985)
TX: H3.1 U1.31 | length 8.2
  Top Layer w0.2: U1.31 109.36,93.529 v1(109.61,93.779)
  Bottom Layer w0.2: H3.1 108.255,88.976 109.017,89.738 109.017,93.186 v1(109.61,93.779)
VBAT: C8.2 C21.2 H4.1 pad.1 Q2.3 U3.2 U3.3 U8.1 U9.5 | length 46
  Top Layer w0.2: v1(104.345,107.395) 104.859,107.395 C8.2
  Top Layer w0.3: U3.2@103.798,106.895 U3.3 v1(104.345,107.395)
  Top Layer w1: H4.1 H4.1@108.907,109.441 ; v1(110.109,106.713) 110.109,108.238 H4.1@108.907,109.441 ; v1(118.315,109.441) v1(117.348,109.441) v1(116.406,109.441) H4.1@108.907,109.441
  Bottom Layer w0.2: v1(104.345,107.395) 104.345,106.729 106.68,104.394 107.95,104.394
  Bottom Layer w1: v1(93.998,105.152) 94.738,105.152 v1(94.742,105.156) 95.377,105.156 ; v1(99.822,106.172) 99.568,105.918 v1(99.187,105.918) 96.393,105.918 95.631,105.156 95.377,105.156 ; v1(110.109,106.713) v1(110.109,105.967) 110.109,104.902 109.347,104.14 107.933,104.14 105.647,101.854 98.679,101.854 95.377,105.156
VCC: D1.2 D2.5 H3.10 Q2.1 R5.1 R6.2 R7.1 R13.1 U9.4 U9.8 U10.1 USB1.A4B9 USB1.B4A9 | length 57.2
  Top Layer w0.2: R7.1 92.554,91.11 92.554,91.927 93.596,92.969 93.596,93.668 93.337,93.927 D2.5
  Top Layer w0.254: v1(91.617,90.8) 92.244,90.8 R7.1 ; 92.33,105.791 93.853,105.791 95.631,107.569 96.247,107.569 97.009,106.807 U10.1 97.009,106.016 97.281,105.745 U9.8 ; R5.1 92.329,106.385 92.329,105.792 92.329,103.759 93.048,103.04 Q2.1 ; R13.1 99.042,102.216 ; U9.4 99.042,103.324 99.042,102.216 ; v1(101.727,104.521) 101.6,104.521 100.224,103.145 100.224,102.637 99.803,102.216 99.042,102.216
  Top Layer w0.5: v1(89.515,100.912) 90.869,100.912 R6.2
  Bottom Layer w0.254: 86.868,93.599 87.249,93.599 90.048,90.8 v1(91.617,90.8) ; v1(96.139,107.586) 100.61,107.586 101.727,106.469 v1(101.727,104.521)
  Bottom Layer w0.5: H3.10 85.395,92.507 86.487,93.599 86.868,93.599 86.868,96.012 88.182,97.326 89.515,97.326 ; v1(89.515,96.112) 89.515,97.326 ; v1(89.515,100.912) 89.515,97.326
VIN: C24.2 D1.1 Q2.2 U7.11 U7.12
pads on no net: BOOT.1 BOOT.3 IMU.2 IMU.3 IMU.10 IMU.11 LED.1 RST.1 RST.3 SW3.1 SW3.4 SW3.5 SW3.6 SW3.7 U1.4 U1.7 U1.21 U1.32 U1.33 U1.34 U1.35 U7.10 USB1.A8 USB1.B8

## Polygon pours and split planes (outlines as drawn)
$2N1928 on Bottom Layer (solid, remove dead copper, pour order 26): 96.139,98.806 96.139,97.536 93.472,97.536 93.472,99.187 95.758,99.187
VIN on Top Layer (solid, remove dead copper, pour order 0): 97.304,97.927 98.685,97.927 98.685,100.034 97.304,100.034
$2N1927 on Bottom Layer (solid, remove dead copper, pour order 28): 96.139,96.012 95.758,95.631 93.504,95.631 93.504,97.282 96.135,97.282 96.139,97.278
3.3V on Top Layer (solid, remove dead copper, pour order 2): 96.054,96.427 96.304,96.677 97.554,96.677 97.804,96.427 97.804,93.935 96.054,93.935
$2N1928 on Top Layer (solid, remove dead copper, pour order 4): 97.05,97.677 97.05,98.173 96.296,98.927 95.554,98.927 95.431,98.804 95.431,97.804 95.685,97.55 96.05,97.55 96.177,97.677
B- on Bottom Layer (solid, remove dead copper, pour order 30): 111.506,106.172 112.097,106.172 113.226,107.301 112.195,108.331 111.633,108.331 111.506,108.204
$2N1927 on Top Layer (solid, remove dead copper, pour order 6): 94.234,97.282 91.332,97.282 91.104,97.054 91.104,95.504 94.234,95.504
GND on Bottom Layer (solid, remove dead copper, pour order 32): 79.756,119.761 109.22,119.761 114.3,114.681 114.3,84.709 105.791,76.2 80.772,76.2 79.756,77.216
$2N1928 on Top Layer (solid, remove dead copper, pour order 8): 91.44,97.536 91.104,97.872 91.104,99.288 91.143,99.327 94.221,99.327 94.234,99.314 94.234,97.536
VCC on Top Layer (solid, remove dead copper, pour order 10): 91.059,102.108 92.202,102.108 92.583,102.489 93.474,102.489 93.726,102.237 93.726,100.203 93.345,99.822 92.202,99.822 90.805,101.219 90.805,101.854
VBAT on Top Layer (solid, remove dead copper, pour order 12): 112.693,107.887 113.138,107.442 113.538,107.442 113.538,109.855 112.693,109.855
B- on Top Layer (solid, remove dead copper, pour order 14): 113.158,107.284 112.776,107.666 112.776,108.204 111.76,108.204 111.76,106.299 112.776,106.299 112.776,106.903 113.157,107.284
VBAT on Top Layer (solid, remove dead copper, pour order 16): 98.552,105.029 98.901,105.029 99.328,104.602 100.099,104.602 100.325,104.828 100.325,106.304 100.203,106.426 99.187,106.426 98.552,105.791
VBAT on Top Layer (solid, remove dead copper, pour order 18): 93.472,103.378 94.488,103.378 95.123,104.013 95.123,105.537 94.996,105.664 93.98,105.664 93.472,105.156
VIN on Top Layer (solid, remove dead copper, pour order 20): 94.312,102.44 94.488,102.616 95.377,102.616 95.767,102.226 95.767,100.948 96.131,100.584 98.207,100.584 98.679,100.112 98.679,98.236 98.37,97.927 97.292,97.927 97.282,97.917 97.282,97.937 96.301,98.918 95.841,98.918 95.213,99.546 94.637,99.546 94.312,99.871
VBAT on Top Layer (solid, remove dead copper, pour order 22): 109.601,107.061 110.617,107.061 110.617,105.537 109.728,105.537 109.601,105.664
GND on Top Layer (solid, remove dead copper, pour order 24): 80.645,115.951 113.03,115.951 114.3,114.681 114.3,85.344 112.522,83.566 77.597,83.566 76.2,82.169 76.2,111.506

## Keep-outs
Board Outline Layer:
  lines w0.254: 82.931,87.598 ccw(c84.931,87.598) 84.931,85.598 ; 82.931,87.598 82.931,109.76 ; 82.931,87.598 ccw(c84.931,87.598) 84.931,85.598 ; 82.931,87.598 82.931,109.76 ; 82.931,109.76 cw(c84.931,109.76) 84.931,111.76 ; 82.931,109.76 cw(c84.931,109.76) 84.931,111.76 ; 84.931,85.598 117.761,85.598 ; 84.931,85.598 117.761,85.598 ; 84.931,111.76 117.761,111.76 ; 84.931,111.76 117.761,111.76 ; 117.761,85.598 ccw(c117.761,87.598) 119.761,87.598 ; 117.761,85.598 ccw(c117.761,87.598) 119.761,87.598 ; 117.761,111.76 cw(c117.761,109.76) 119.761,109.76 ; 117.761,111.76 cw(c117.761,109.76) 119.761,109.76 ; 119.761,87.598 119.761,109.76 ; 119.761,87.598 119.761,109.76

## Other copper
Top Layer:
  region net GND: 90.331,94.482 90.696,94.824 cw(c95.034,99.163) 90.165,95.429 89.726,95.012 cw(c85.992,90.143)

## Silkscreen, mask and mechanical layers (free items; w line width, h text height)
Top Silkscreen Layer:
  drawing of 15 lines, arcs and shapes, not listed
  text "Y" at 116.852,91.171 h1.44 r270
  text "Z" at 115.397,88.834 h1.44 r270
  text "X" at 117.829,87.618 h1.44 r270
Bottom Silkscreen Layer:
  drawing of 29 lines, arcs and shapes, not listed
  text "21" at 96.197,107.478 h1.45
  text "3V" at 86.055,107.437 h1.47
  text "EN" at 88.595,107.437 h1.47
  text "20" at 93.67,107.451 h1.45
  text "19" at 91.054,107.427 h1.45
  text "5" at 98.554,107.427 h1.45
  text "4" at 101.054,107.427 h1.45
  text "2" at 103.554,107.427 h1.45
  text "B-" at 106.554,107.427 h1.45
  text "B+" at 109.304,107.427 h1.45
  text "+" at 115.371,106.937 h5
  text "Sprig-C6" at 111.304,106.427 h3.2 r90
  text "OFF" at 118.804,105.427 h1.44 r90
  text "SPI /  Q" at 91.304,104.677 h1.2
  text "SPI /  D" at 93.804,104.677 h1.2
  text "SPI / CLK" at 96.554,104.677 h1.2
  text "BATTERY" at 114.554,102.177 h1.6 r90
  text "NTC" at 104.054,100.177 h1.6 r90
  text "ON" at 118.776,94.447 h1.44 r90
  text "D-" at 95.993,90.268 h1.2
  text "D+" at 98.743,90.268 h1.2
  text "SCL" at 101.554,90.177 h1.2
  text "SDA" at 104.554,90.177 h1.2
  text "-" at 116.244,89.51 h5 r90
  text "GND" at 89.054,88.677 h1.2
  text "7" at 101.073,88.44 h1.47
  text "6" at 103.573,88.44 h1.47
  text "5V" at 86.054,88.427 h1.47
  text "20" at 91.304,88.427 h1.47
  text "8" at 93.304,88.427 h1.47
  text "12" at 96.054,88.427 h1.47
  text "13" at 98.804,88.427 h1.47
  text "RX" at 106.554,88.427 h1.2
  text "TX" at 109.059,88.417 h1.2